# Altium PCB 04-12307_Drone_ESC.PcbDoc (part 5 of 5)
Units mm, origin at the board's own origin, x right, y up, seen from the top; angles counter-clockwise.
Board outline 55 x 33 mm, 4 copper layers (LAYER 1 (Top), LAYER 2, LAYER 3, LAYER 4 (Bottom)), stack 1.504 mm thick; 174 components, 90 nets, 407 pads, 193 vias.
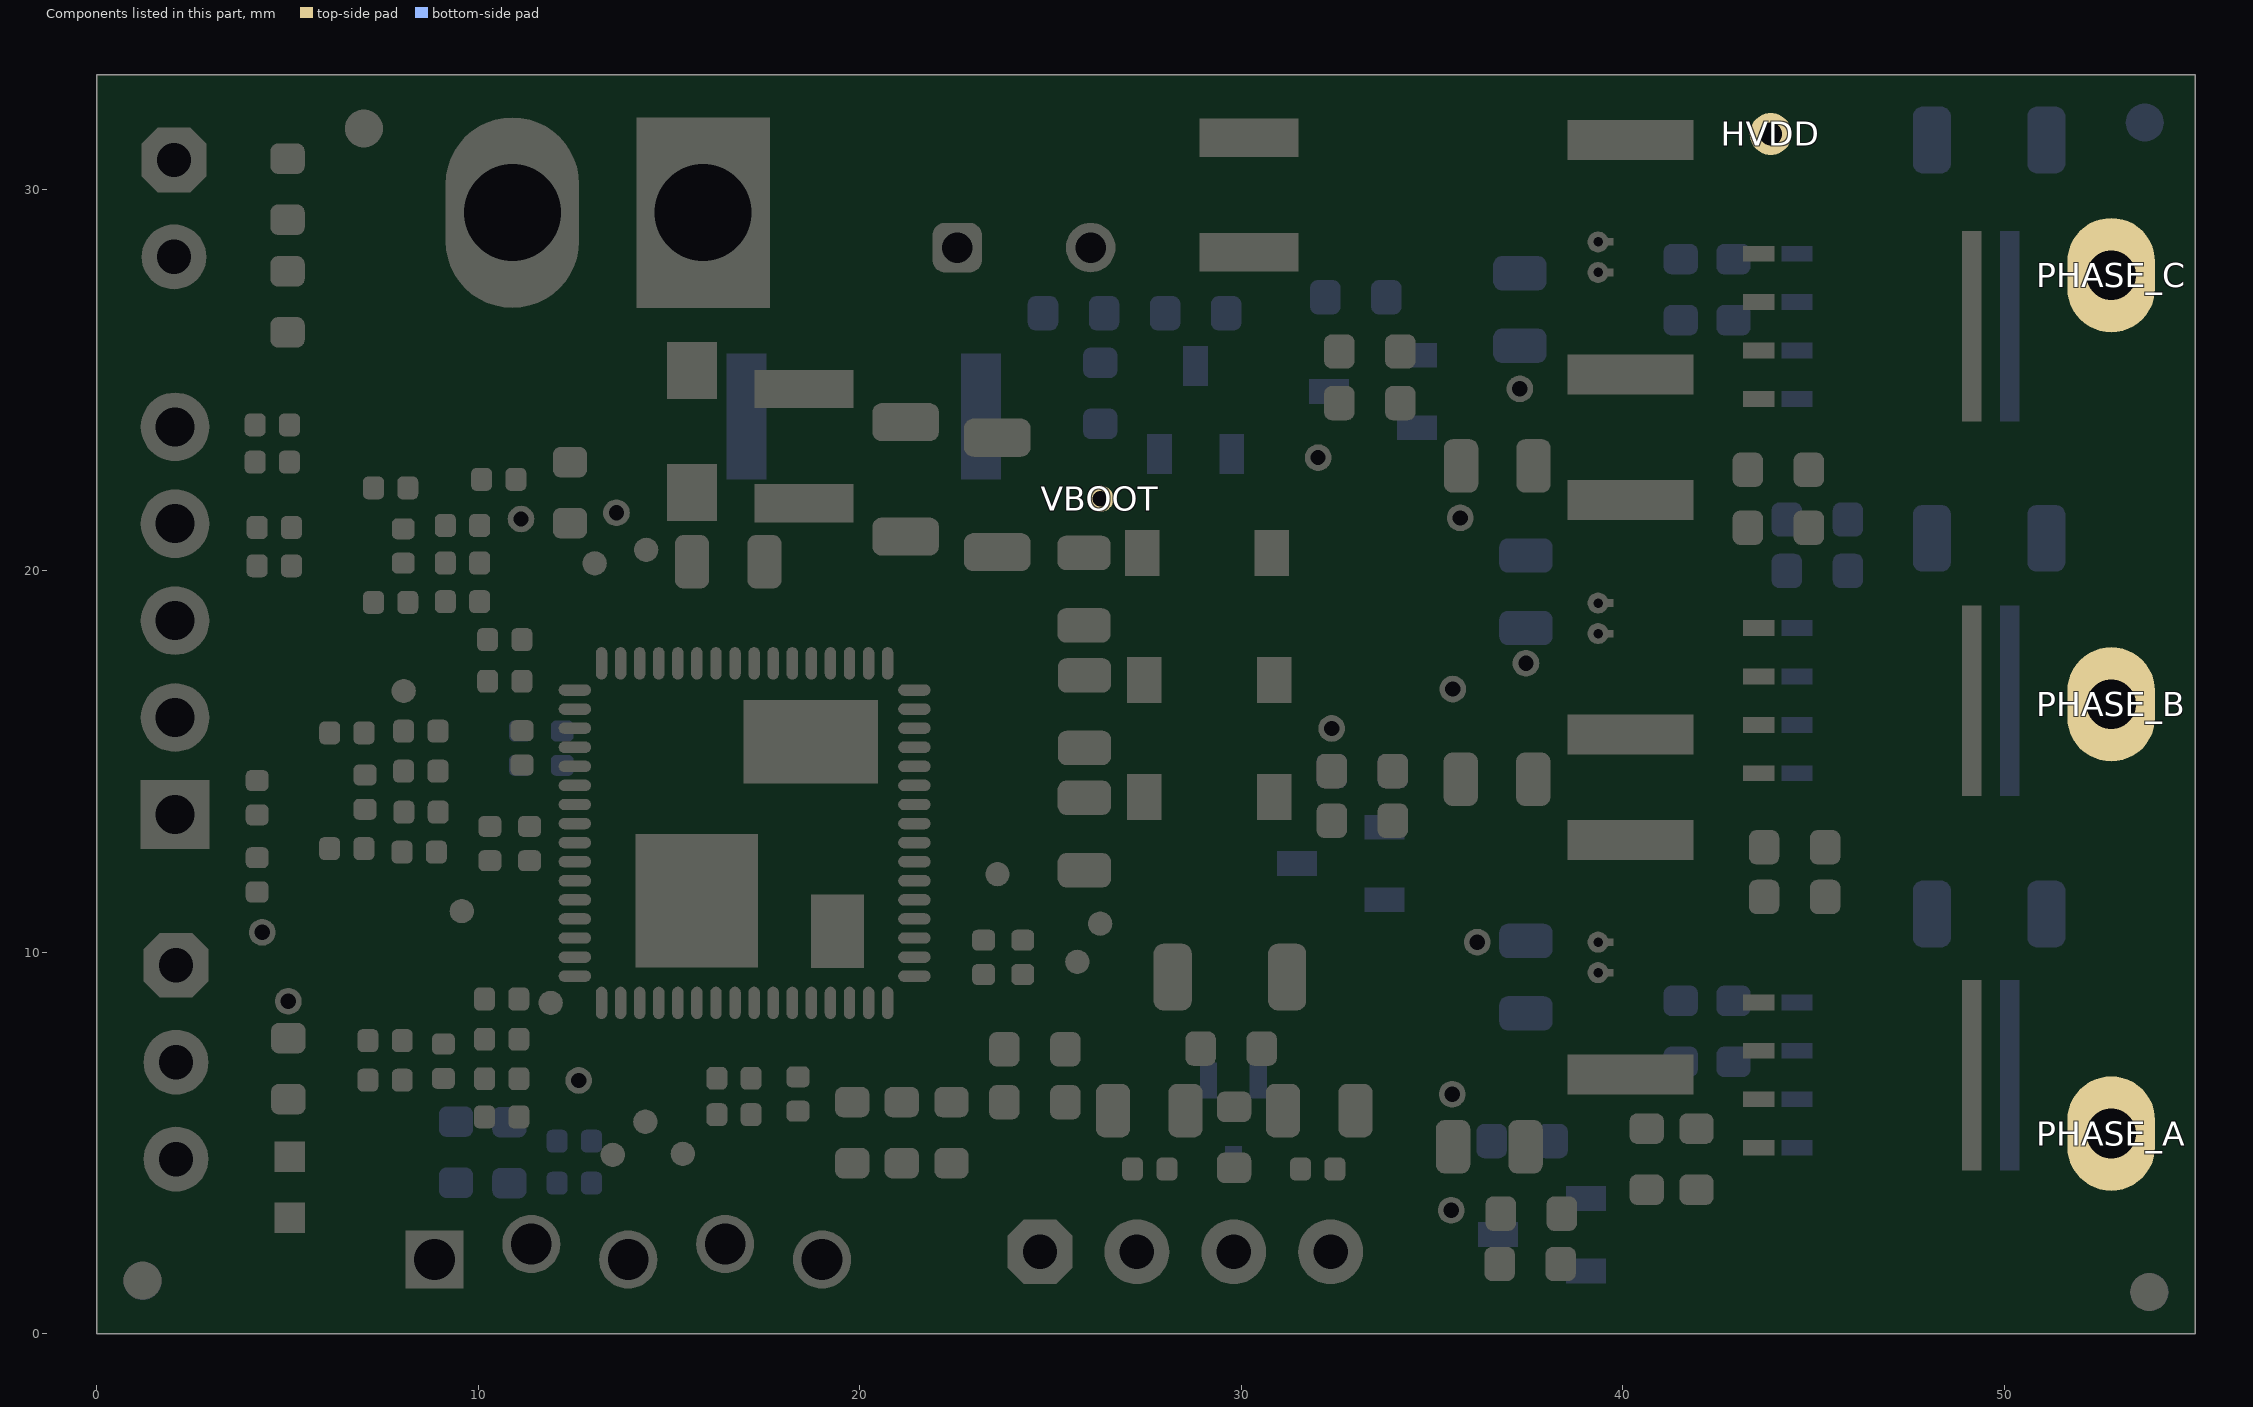
[diagram p5: the components of this part, seen from the top]

## Polygon pours and split planes (outlines as drawn)
GND on LAYER 1 (Top) "GND_L01_P066" (solid, remove dead copper, pour order 66): 9.501,32.1 11.674,32.1 12.775,31 12.775,26.629 11.571,25.425 9.598,25.425 8.118,26.905 8.118,30.717
PHASE_A on LAYER 1 (Top) "PHASE_A_L01_P044" (solid, remove dead copper, pour order 44): 53.289,2.23 53.88,2.23 54.2,2.55 54.2,11.05 45.113,11.05 45.113,0.95 52.009,0.95
NetC110_1 on LAYER 1 (Top) "NETC110_1_L01_P058" (solid, remove dead copper, pour order 58): 42.375,4.978 42.774,5.376 44.075,5.376 44.075,9.694 40.848,9.694 40.538,9.383 40.538,7.279 39.863,7.279 39.863,7.835 39.602,8.095 37.86,8.095 37.86,6.15 38.366,5.644 39.9,5.644 40,5.544 40,4.978
PHASE_B on LAYER 1 (Top) "PHASE_B_L01_P002" (solid, remove dead copper, pour order 2): 45.094,14.545 46.5,13.139 46.5,12.05 54.125,12.05 54.125,20.95 45.094,20.95
+5V on LAYER 1 (Top) "+5V_L01_P062" (solid, remove dead copper, pour order 62): 24.2,3.95 24.2,7.95 22.129,7.95 21.129,8.95 20.6,8.95 20.6,8.25 21.731,7.119 23.131,7.119 23.368,6.882 23.368,2.182 24.2,1.35 25.1,1.35 25.388,1.638 25.388,2.762
NetC109_1 on LAYER 1 (Top) "NETC109_1_L01_P045" (solid, remove dead copper, pour order 45): 41.8,21.32 42.389,20.73 43.7,20.73 43.7,23.15 42.9,23.95 42.9,24.852 43.217,25.169 44.1,25.169 44.1,28.553 40.96,28.553 40.538,28.131 40.538,25.65 39.852,25.65 39.852,26.275 38.468,26.275 38.468,21.32
HVDD on LAYER 1 (Top) "HVDD_L01_P059" (solid, remove dead copper, pour order 59): 18.2,19.55 18.2,20.958 17.9,21.258 17.229,21.258 17.229,23.063 17.435,23.27 19.745,23.27 19.908,23.106 19.908,20.858 18.6,19.55
GND on LAYER 1 (Top) "GND_L01_P052" (solid, remove dead copper, pour order 52): 33.8,24.535 33.8,23.996 35.251,23.996 38.182,26.926 38.231,30.215 38.787,30.771 42.565,30.771 42.565,32.288 14.9,32.289 14.9,24.535 14.9,23.913 15.038,23.775 19.795,23.775 20.747,22.822 31.172,22.822 31.55,23.2 31.55,26.26 31.84,26.55 33.8,26.55
NetC109_1 on LAYER 1 (Top) "NETC109_1_L01_P050" (solid, remove dead copper, pour order 50): 43.1,10.954 42.817,10.671 40.849,10.671 40.553,10.974 40.553,12.329 39.863,12.329 39.863,10.965 39.647,10.75 37.512,10.75 37.286,10.976 37.286,13.331 37.438,13.484 42.93,13.484 43.1,13.313
NetC108_1 on LAYER 1 (Top) "NETC108_1_L01_P034" (solid, remove dead copper, pour order 34): 38.4,17.75 38.4,15.103 44.152,15.103 44.3,14.955 44.3,13.85 44.907,13.243 44.907,11.05 45.7,11.05 45.7,13.314 44.7,14.293 44.7,19.15 44.445,19.405 41.071,19.405 40.501,18.836 40.501,16.211 39.816,16.211 39.816,17.75
VBOOT on LAYER 1 (Top) "VBOOT_L01_P049" (solid, remove dead copper, pour order 49): 22.704,22.054 23.1,22.45 30.986,22.45 31.3,22.136 31.3,13.45 29.4,13.45 29.4,20.997 29.067,21.33 24.78,21.33 24.5,21.05 24.5,19.968 22.704,19.968
VDD on LAYER 1 (Top) "VDD_L01_P047" (solid, remove dead copper, pour order 47): 4.667,29.604 4.667,27.509 6.118,27.509 6.401,27.792 6.401,29.369 6.166,29.604
VDC on LAYER 1 (Top) "VDC_L01_P037" (solid, remove dead copper, pour order 37): 32.4,31.9 32.15,32.15 13.956,32.15 13.956,26.85 22.3,26.85 23.788,28.338 25.8,30.35 31.9,30.35 32.4,30.85
PHASE_C on LAYER 1 (Top) "PHASE_C_L01_P039" (solid, remove dead copper, pour order 39): 53.478,32.372 54.104,31.746 54.104,23.119 45.1,23.119 45.1,32.372
NetC110_1 on LAYER 3 "NETC110_1_L03_P063" (solid, remove dead copper, pour order 63): 37.779,8.429 43.2,8.429 43.2,5.306 37.779,5.306
NetC109_1 on LAYER 3 "NETC109_1_L03_P055" (solid, remove dead copper, pour order 55): 37.627,13.881 44.6,13.881 44.6,10.758 37.627,10.758
NetC108_1 on LAYER 3 "NETC108_1_L03_P054" (solid, remove dead copper, pour order 54): 37.6,19.405 44.6,19.405 44.6,15.091 37.6,15.091
NetC109_1 on LAYER 3 "NETC109_1_L03_P024" (solid, remove dead copper, pour order 24): 37.9,26.25 43.075,26.25 43.075,22.526 37.9,22.526
PHASE_A on LAYER 3 "PHASE_A_L03_P025" (solid, remove dead copper, pour order 25): 51.273,8.75 51.273,1.872 54.048,1.872 54.048,8.75
PHASE_C on LAYER 3 "PHASE_C_L03_P026" (solid, remove dead copper, pour order 26): 51.396,23.97 51.396,30.05 54.1,30.05 54.1,23.97
PHASE_B on LAYER 3 "PHASE_B_L03_P043" (solid, remove dead copper, pour order 43): 51.4,12.951 51.4,20.049 54.1,20.049 54.1,12.951
VDD on LAYER 3 "VDD_L03_P053" (solid, remove dead copper, pour order 53): 34.6,0.65 34.6,24.75 8.3,24.75 8.3,29.65 0.6,29.65 0.6,0.65
VDC on LAYER 3 "VDC_L03_P046" (solid, remove dead copper, pour order 46): 32.7,26.25 35.55,29.1 40.2,29.1 41.549,27.751 45.749,27.751 46.3,27.2 46.3,5.54 51,5.54 51,32.35 13.956,32.35 13.956,26.25
PHASE_A on LAYER 4 (Bottom) "PHASE_A_L04_P028" (solid, remove dead copper, pour order 28): 52.715,1.599 53.332,2.217 54.02,2.217 54.193,2.397 54.193,8.55 51.5,8.55 51.5,1.599
GND on LAYER 4 (Bottom) "GND_L04_P065" (solid, remove dead copper, pour order 65): 4.6,32.3 3.7,31.4 3.7,30.3 2.6,29.204 1.675,29.204 0.7,28.229 0.7,3.6 3.65,0.65 34.322,0.65 34.322,32.3
PHASE_B on LAYER 4 (Bottom) "PHASE_B_L04_P064" (solid, remove dead copper, pour order 64): 44.166,17.4 44.166,14.436 45.678,14.436 45.678,17.4
VDC on LAYER 4 (Bottom) "VDC_L04_P032" (solid, remove dead copper, pour order 32): 22.2,25.975 21.425,26.75 13.956,26.75 13.956,32.3 49.444,32.3 50.6,31.144 50.6,2.75 46.252,2.75 46.252,28.798 45.7,29.35 25.677,29.35 25.2,28.873 25.2,26.35 24.663,25.813 24.663,22.613 24.4,22.35 22.493,22.35 22.2,22.643
PHASE_C on LAYER 4 (Bottom) "PHASE_C_L04_P031" (solid, remove dead copper, pour order 31): 41,26.961 41.116,27.078 43.423,27.078 43.795,27.45 45.663,27.45 45.663,24.208 44.1,24.208 44.1,25.61 43.56,26.15 41.1,26.15 41,26.25
HVDD on LAYER 4 (Bottom) "HVDD_L04_P060" (solid, remove dead copper, pour order 60): 19.5,22.35 19.805,22.65 19.805,23.722 17.767,25.76 16.469,25.76 16.469,22.35
NetC109_1 on LAYER 4 (Bottom) "NETC109_1_L04_P051" (solid, remove dead copper, pour order 51): 40.123,26.25 40.859,25.515 42.834,25.515 43.1,25.249 43.031,11.056 37.7,11.056 37.7,13.35 40,15.65 40,20.6 38.475,22.125 38.475,26.25
PHASE_C on LAYER 4 (Bottom) "PHASE_C_L04_P022" (solid, remove dead copper, pour order 22): 51.26,29.171 51.739,29.65 54.125,29.65 54.125,24.594 51.26,24.594
PHASE_A on LAYER 4 (Bottom) "PHASE_A_L04_P023" (solid, remove dead copper, pour order 23): 41.124,7.728 45.176,7.728 46.16,7.728 46.16,4.589 44.089,4.589 44.089,6.632 41.124,6.632 41.124,7.144
PHASE_B on LAYER 4 (Bottom) "PHASE_B_L04_P033" (solid, remove dead copper, pour order 33): 51.26,19.044 51.639,19.423 54.125,19.423 54.125,13.247 51.26,13.247
GND on LAYER 2 (split plane): 54.49,0.51 0.51,0.51 0.51,32.49 54.49,32.49
NetC109_1 on LAYER 2 (split plane): 47.749,10.964 36.937,10.964 33.551,14.349 33.551,22.546 39.054,28.049 47.749,28.049

## Keep-outs
Keep-Out Layer:
  text "'.Layer_Name'" at 229.531,-147.547 h1.5

## Other copper
LAYER 1 (Top):
  region net GND: 12.4,15.525 12.971,15.525 13.305,15.859 13.73,16.284 16.506,16.284 17.15,16.929 18.487,16.929 18.582,17.023 18.582,17.876 18.605,17.898 18.859,17.898 18.864,17.894 18.864,17.124 19.056,16.932 20.34,16.932 20.48,16.792 20.48,10.836 20.799,10.517 21.706,10.517 21.706,10.232 21.708,10.23 20.819,10.23 20.648,10.059 20.648,9.411 20.547,9.31 16.988,9.31 16.87,9.193 16.87,8.411 16.819,8.359 16.612,8.359 16.587,8.385 16.587,9.182 16.458,9.31 13.229,9.31 13.229,10.317 ccw(c13.229,10.91) 13.821,10.91 13.821,10.911 ccw(c13.3,10.911) 13.3,11.432 13.229,11.432 13.229,12.559 13.804,13.134 13.804,14.94 ccw(c13.286,14.83) 13.396,15.348 ccw(c13.286,14.836) 12.998,15.273 12.961,15.236 12.4,15.236
  region net VDD: 8.7,12.45 8.7,12.642 9.589,13.532 11.558,13.532 12.077,13.012 12.714,13.012 12.739,12.987 12.739,12.751 12.723,12.735 11.805,12.735 11.543,12.996 9.639,12.996 9.094,12.452 8.714,12.452
  text "'.ProjectRevisionART'" at 264.709,-147.369 h1.5
  text "'.Layer_Name'" at 229.531,-147.547 h1.5
LAYER 3:
  text "'.Layer_Name'" at 229.975,-147.625 h1.5
LAYER 4 (Bottom):
  pour cut-out: 28.241,9.453 26.753,9.453 24.438,7.138 24.438,5.759 29.816,5.759 30.7,4.875 30.7,1.199 30.148,0.647 34.769,0.647 34.769,28.821 30.125,28.821 30.104,28.8 31.084,27.82 31.084,22.4 28.207,19.523 23.366,19.523 21.208,17.365 21.208,8.616 19.6,7.007 19.6,3.475 21.325,3.475 21.325,7.3 25.798,11.773 32.237,11.77 33.079,12.613 33.079,13.705 34.3,13.705 34.3,12.42 33.929,12.049 33.113,12.049 30.531,9.467 28.255,9.467
  text ".ProjectRevisionART" at 264.709,-147.369 h1.5
  text ".ProjectRevisionART" at 264.709,-147.369 h1.5
  text "'.ProjectRevisionART'" at 264.709,-147.369 h1.5
  text "'.Layer_Name'" at 229.531,-147.547 h1.5
LAYER 2 (plane layer: these items are gaps in the copper):
  lines w0.25: 52.66,13.705 52.66,16.65 52.8,16.65 52.8,14.486 53.58,13.705 ; 52.66,25.052 52.66,27.864 52.8,27.864 52.8,25.832 53.58,25.052 ; 52.76,7.948 52.76,5.25 52.8,5.25
  lines w0.3: 33.4,14.287 33.4,22.609 38.991,28.2 47.9,28.2 47.9,10.813 36.874,10.813 33.4,14.287
  text "'.Layer_Name'" at 230.125,-147.625 h1.5

## Silkscreen, mask and mechanical layers (free items; w line width, h text height)
Top Overlay:
  text "+" at 19.044,29.985 h3
  text "M" at 5.599,23.168 h3.3
  text "GND" at 3.8,18.317 h1.5
  text "VDD" at 3.885,16.31 h1.5
  text "dsPIC®" at 23.937,13.821 h1.8 r90
  text "PWM" at 5.019,11.059 h1.5
  text "." at 8.413,4.606 h5 r270
  text "04-'.ProjectPCBNumber'" at 42.5,1.997 h1.8
  text "REV" at 42.625,0.517 h1.8
  text "'.ProjectRevisionART'" at 47.325,0.511 h1.8
  text "PGC" at 21.595,0.453 h1.5 r90
  text "MCLR" at 7.084,0.4 h1.5 r90
  text "'.ProjectRevisionART'" at 264.709,-147.369 h1.5
  text "'.Layer_Name'" at 229.531,-147.547 h1.5
Bottom Overlay:
  lines w0.2: 36.721,17.077 ccw(c39.851,14.428) 37.382,11.155 ; 38.681,18.358 cw(c39.851,14.428) 43.851,15.325
  text "*h" at 37.158,28.621 h4.1
  text "" at 7.9,28.6 h5
  text "C" at 29.739,9.417 h7
  text "" at 23.1,6.342 h10
  text "4" at 27.248,3.785 h5
  text "1" at 19.908,3.738 h5
  text "DRONE ESC" at 50.861,2.342 h1.6
  text "" at 7.3,0.8 h6
  text "dsPIC33CDV" at 51,0.788 h1.6
  text "'.ProjectRevisionART'" at 264.709,-147.369 h1.5
  text "'.Layer_Name'" at 229.531,-147.547 h1.5
Top Paste:
  text "'.ProjectRevisionART'" at 264.709,-147.369 h1.5
  text "'.Layer_Name'" at 229.531,-147.547 h1.5
Bottom Paste:
  text "'.ProjectRevisionART'" at 264.709,-147.369 h1.5
  text "'.Layer_Name'" at 229.531,-147.547 h1.5
Top Solder:
  text "'.ProjectRevisionART'" at 264.709,-147.369 h1.5
  text "'.Layer_Name'" at 229.531,-147.547 h1.5
Bottom Solder:
  text "'.ProjectRevisionART'" at 264.709,-147.369 h1.5
  text "'.Layer_Name'" at 229.531,-147.547 h1.5
Drill Guide:
  text "'.Layer_Name'" at 229.975,-147.55 h1.5
NOTES (M1):
  text "'.Layer_Name'" at 247.531,-147.547 h1.5
BOARD (M2):
  the board outline again, w0.1
  text "'.ProjectRevisionART'" at 264.709,-147.369 h1.5
  text "'.Layer_Name'" at 239.8,-147.6 h1.5
REF POINTS (M3):
  text "'.Layer_Name'" at 229.531,-147.547 h1.5
FAB (M4):
  lines w0.1: 0,0 0,33 55,33 55,0 0,0
  lines w0.15: 164.398,-110 174.753,-110 201.425,-110 221.207,-110 236.627,-110 ; 164.398,-106.4 174.753,-106.4 201.425,-106.4 221.207,-106.4 236.627,-106.4 ; 164.398,-102.8 174.753,-102.8 201.425,-102.8 221.207,-102.8 236.627,-102.8 ; 164.398,-99.2 174.753,-99.2 201.425,-99.2 221.207,-99.2 236.627,-99.2 ; 164.398,-95.6 174.753,-95.6 201.425,-95.6 221.207,-95.6 236.627,-95.6 ; 164.398,-92 174.753,-92 201.425,-92 221.207,-92 236.627,-92 ; 164.398,-88.4 174.753,-88.4 201.425,-88.4 221.207,-88.4 236.627,-88.4 ; 164.398,-84.8 174.753,-84.8 201.425,-84.8 221.207,-84.8 236.627,-84.8 ; 164.398,-81.2 174.753,-81.2 201.425,-81.2 221.207,-81.2 236.627,-81.2 ; 164.398,-77.6 174.753,-77.6 201.425,-77.6 221.207,-77.6 236.627,-77.6 ; 164.398,-74 236.627,-74 ; 174.753,-70.4 174.753,-113.6 ; 201.425,-70.4 201.425,-113.6 ; 221.207,-70.4 221.207,-113.6 ; 174.753,-113.6 201.425,-113.6 ; 174.753,-113.6 164.398,-113.6 164.398,-70.4 236.627,-70.4 236.627,-113.6 221.207,-113.6 ; 201.425,-113.6 221.207,-113.6
  lines w0.254: 186.975,42.704 189.515,45.244 ; 186.975,45.244 189.515,42.704 ; 257.714,28.281 259.238,28.281 ; 257.714,29.805 259.238,29.805 ; 258.476,29.043 258.476,30.567 ; 186.34,1.239 186.34,5.049 190.15,5.049 190.15,1.239 186.34,1.239 ; 186.34,6.849 186.34,10.659 190.15,10.659 190.15,6.849 186.34,6.849 ; 186.34,12.349 186.34,16.159 190.15,16.159 190.15,12.349 186.34,12.349 ; 186.34,17.629 186.34,21.439 190.15,21.439 190.15,17.629 186.34,17.629 ; 186.34,42.069 190.15,42.069 190.15,45.879 186.34,45.879 186.34,42.069 ; 186.84,-24.871 190.65,-24.871 190.65,-21.061 186.84,-21.061 186.84,-24.871 ; 196.58,-41.401 216.031,-41.401 216.031,-37.591 196.58,-37.591 196.58,-41.401 ; 206.531,-29.547 206.531,-25.737 266.531,-25.737 266.531,-29.547 206.531,-29.547 ; 206.66,-6.001 206.66,-2.191 270.16,-2.191 270.16,-6.001 206.66,-6.001 ; 214.28,42.069 218.09,42.069 218.09,45.879 214.28,45.879 214.28,42.069 ; 216.82,-18.701 216.82,-14.891 270.16,-14.891 270.16,-18.701 216.82,-18.701 ; 216.82,-12.351 216.82,-8.541 270.16,-8.541 270.16,-12.351 216.82,-12.351 ; 237.031,22.629 240.841,22.629 240.841,26.439 237.031,26.439 237.031,22.629 ; 237.14,27.519 246.03,27.519 246.03,31.329 237.14,31.329 237.14,27.519 ; 237.14,32.369 246.03,32.369 246.03,36.179 237.14,36.179 237.14,32.369 ; 237.14,37.219 246.03,37.219 246.03,41.029 237.14,41.029 237.14,37.219 ; 237.14,42.069 240.95,42.069 240.95,45.879 237.14,45.879 237.14,42.069 ; 245.87,-41.401 250.275,-41.401 250.275,-37.591 245.87,-37.591 245.87,-41.401 ; 254.031,22.629 257.841,22.629 257.841,26.439 254.031,26.439 254.031,22.629 ; 260,27.519 268.89,27.519 268.89,31.329 260,31.329 260,27.519
  text "THIS PCB TO BE MANUFACTURED TO MEET ALL ACCEPTANCE LEVELS" at 166.02,55.865 h1.78
  text "OF A CLASS 2 PCB PER ANSI/IPC-A-600G." at 166.02,52.055 h1.78
  text "MATERIAL:" at 166.02,47.435 h1.78
  text "FR-4 (Tg170) or Equivalent" at 186.34,47.435 h1.78
  text "CONTROLLED IMPEDANCE" at 242.531,43.203 h1.78
  text "MULTILAYER" at 192.055,43.085 h1.78
  text "4" at 215.55,43.085 h1.78
  text "LAYERS" at 219.995,43.085 h1.78
  text "Cu WEIGHT EXTERNAL LAYERS" at 186.34,38.235 h1.78
  text "70um" at 238.41,38.235 h1.78
  text "FINISHED" at 247.935,38.235 h1.78
  text "Cu WEIGHT INTERNAL LAYERS" at 186.34,33.385 h1.78
  text "35um" at 238.41,33.385 h1.78
  text "FINISHED" at 247.935,33.385 h1.78
  text "FINISHED OVERALL THICKNESS" at 186.34,28.535 h1.78
  text "1.6" at 239.68,28.535 h1.78
  text "mm" at 247.935,28.535 h1.78
  text "10" at 262.54,28.535 h1.78
  text "%" at 270.795,28.535 h1.78
  text "COPPER THIEVING ALLOWED" at 186.531,23.703 h1.78
  text "YES" at 243.531,23.703 h1.78
  text "NO" at 260.531,23.703 h1.78
  text "X" at 255.122,23.203 h2.6
  text "FINISH:" at 166.031,19.203 h1.78
  text "LEAD-FREE HOT AIR LEVELING" at 192.031,18.903 h1.78
  text "IMMERSION GOLD" at 192.055,13.365 h1.78
  text "X" at 187.349,12.865 h2.6
  text "IMMERSION TIN" at 192.055,7.865 h1.78
  text "SMOBC WITH SELECTIVE GOLD PLATING ON LANDS" at 192.055,4.16 h1.78
  text "INDICATED. 1um GOLD OVER 5-10 um NICKEL" at 192.055,0.35 h1.78
  text "SOLDERMASK" at 186.34,-4.985 h1.78
  text "DYNACHEM EPIC 200 LPI OR EQUIVALENT" at 207.93,-4.985 h1.78
  text "SOLDERMASK COLOR" at 186.34,-11.335 h1.78
  text "RED HIGH GLOSS" at 218.09,-11.335 h1.78
  text "SILKSCREEN COLOR" at 186.34,-17.685 h1.78
  text "WHITE" at 218.09,-17.685 h1.78
  text "Blind / Burried Vias" at 192.531,-23.797 h1.78
  text "DRILLING:" at 166.531,-24.047 h1.78
  text "Via Layer Pairs" at 187.031,-28.547 h1.78
  text "Top-Bottom" at 207.781,-28.547 h1.78
  text "ALL HOLES TO BE LOCATED BY THE COORDINATES FROM THE NC DRILL DATA PROVIDED." at 166.02,-33.797 h1.78
  text "04-'.ProjectPCBNumber'" at 198.031,-40.297 h1.78
  text "PCB REV" at 234.031,-40.297 h1.78
  text "'.ProjectRevisionART'" at 247.775,-40.35 h1.78
  text "USE ARTWORK SET NO." at 166.02,-40.385 h1.78
  text "ALL UL LOGO, MANUFACTURER'S ID, AND DATE CODES SHALL BE PLACED" at 166.02,-46.735 h1.78
  text "ON THE AVAILABLE SPACE ON THE BOTTOM SIDE SILKSCREEN LAYER UNLESS" at 166.02,-50.545 h1.78
  text "OTHERWISE INDICATED" at 165.825,-54.35 h1.78
  text "ANY ALTERNATIVES TO THE ABOVE SPECIFICATIONS MUST FIRST BE APPROVED." at 165.575,-61.975 h1.78
  text "REFERENCE STACK-UP (ONLY):" at 165.831,-67.022 h1.78
  text "Layer" at 166.452,-73.1 h1.8
  text "Name" at 176.807,-73.1 h1.8
  text "Material" at 206.933,-73.1 h1.8
  text "Thickness" at 223.355,-73.1 h1.8
  text "Top Overlay" at 176.807,-76.7 h1.8
  text "Top Solder" at 176.807,-80.3 h1.8
  text "Solder Resist" at 203.479,-80.3 h1.8
  text "0.010mm" at 223.544,-80.3 h1.8
  text "1" at 169.362,-83.9 h1.8
  text "LAYER 1 (Top)" at 176.807,-83.9 h1.8
  text "0.035mm" at 223.261,-83.9 h1.8
  text "Dielectric 1" at 176.807,-87.5 h1.8
  text "FR-4" at 208.175,-87.5 h1.8
  text "0.453mm" at 223.261,-87.5 h1.8
  text "2" at 168.976,-91.1 h1.8
  text "LAYER 2" at 176.807,-91.1 h1.8
  text "0.035mm" at 223.261,-91.1 h1.8
  text "Dielectric 2" at 176.807,-94.7 h1.8
  text "FR-4" at 208.175,-94.7 h1.8
  text "0.457mm" at 223.261,-94.7 h1.8
  text "3" at 168.976,-98.3 h1.8
  text "LAYER 3" at 176.807,-98.3 h1.8
  text "0.035mm" at 223.261,-98.3 h1.8
  text "Dielectric 3" at 176.807,-101.9 h1.8
  text "FR-4" at 208.175,-101.9 h1.8
  text "0.453mm" at 223.261,-101.9 h1.8
  text "4" at 168.933,-105.5 h1.8
  text "LAYER 4 (Bottom)" at 176.807,-105.5 h1.8
  text "0.035mm" at 223.261,-105.5 h1.8
  text "Bottom Solder" at 176.807,-109.1 h1.8
  text "Solder Resist" at 203.479,-109.1 h1.8
  text "0.010mm" at 223.544,-109.1 h1.8
  text "Bottom Overlay" at 176.807,-112.7 h1.8
  text "Total board thickness:" at 166.452,-116.3 h1.8
  text "1.524mm" at 223.544,-116.3 h1.8
  text "'.ProjectRevisionFAB'" at 264.709,-147.369 h1.5
  text "'.Layer_Name'" at 229.531,-147.547 h1.5
Case (M5):
  text "'.Layer_Name'" at 229.531,-147.547 h1.5
Cover (M6):
  text "'.Layer_Name'" at 229.531,-147.547 h1.5
Terminal Block (M7):
  text "'.Layer_Name'" at 229.531,-147.547 h1.5
Route Tool Path:
  text "'.Layer_Name'" at 229.531,-147.547 h1.5
V-Cut (M9):
  text "'.Layer_Name'" at 229.531,-147.547 h1.5
Bottom Assy TOP (M11)/Assy BOT (M10):
  text "'.VariantName'" at -20.899,-131.547 h0.9
  text "ASSEMBLY VARIANT:" at -6.649,-131.547 h0.9
  text "DOCUMENT NUMBER:" at -52.919,-139.797 h1.14
  text "02-'.ProjectPCBAssyNumber'-D" at -53.169,-142.797 h1.6
  text "'.ProjectRevisionASSY'" at -69.847,-147.369 h1.5
  text "'.Layer_Name'" at -34.969,-147.547 h1
Top Assy TOP (M11)/Assy BOT (M10):
  text "ASSEMBLY NOTES:  UNLESS OTHERWISE SPECIFIED:" at -25.448,-62.217 h5.08
  text "1. WORKMAN SHIP TO BE COMPLIANT WITH THE IPC-A-610, CLASS 2" at -25.448,-67.683 h3.17
  text "2. PRODUCT WILL BE ASSEMBLED USING RoHS COMPLIANT MANUFACTURING PROCESS." at -25.448,-71.992 h3.17
  text "3. ALL COMPONENTS MOUNTED FLUSH TO THE BOARD." at -25.448,-76.187 h3.17
  text "4. ALL LEADS SHALL BE TRIMMED TO A MAXIMUM HEIGHT OF 2mm." at -25.448,-80.632 h3.17
  text "5. ALL UNUSED THROUGH HOLE COMPONENT LOCATIONS SHALL BE FREE OF SOLDER." at -25.448,-85.077 h3.17
  text "6. FINISHED BOARD SHALL BE FREE OF ALL RESIDUES." at -25.448,-89.522 h3.17
  text "7. THIS ASSEMBLY CONTAINS ELECTROSTATIC DISCHARGE (ESD) DEVICES; /     STATIC-FREE HANDLING IS REQUIRED." at -25.448,-97.142 h3.17
  text "ASSEMBLY VARIANT:" at 201.531,-131.547 h0.9
  text "'.VariantName'" at 215.781,-131.547 h0.9
  text "DOCUMENT NUMBER:" at 247.781,-139.797 h1.15
  text "02-'.ProjectPCBAssyNumber'-D" at 248.031,-142.797 h1.6
  text "'.ProjectRevisionASSY'" at 264.709,-147.369 h1.5
  text "'.Layer_Name'" at 229.531,-147.547 h1
Bottom 3D TOP (M13)/3D BOT (M12):
  text "'.Layer_Name'" at 229.531,-147.547 h1.15
Top 3D TOP (M13)/3D BOT (M12):
  circle w0.1: c8.68,-1.15 r0.653
  text "'.Layer_Name'" at 229.531,-147.547 h1.2
Bottom Guard TOP (M15)/Guard BOT (M14):
  text ".ProjectRevisionART" at 264.709,-147.369 h1.5
  text "'.Layer_Name'" at 229.531,-147.547 h1
Top Guard TOP (M15)/Guard BOT (M14):
  text "'.ProjectRevisionART'" at 264.709,-147.369 h1.5
  text "'.Layer_Name'" at 229.531,-147.547 h1.1
TITLE (M16):
  lines w0.1: 201.031,-130.297 282.851,-130.297 ; 253.031,-122.797 253.031,-125.797 282.851,-125.797 ; 271.571,-147.432 271.571,-146.162 ; 271.571,-146.797 281.731,-146.797 ; 271.731,-145.597 271.731,-144.597 ; 271.731,-145.097 281.731,-145.097 ; 274.111,-147.432 274.111,-146.162 ; 276.651,-147.432 276.651,-146.162 ; 276.731,-145.397 276.731,-144.797 ; 279.191,-147.432 279.191,-146.162 ; 281.731,-147.432 281.731,-146.162 ; 281.731,-145.597 281.731,-144.597 ; 282.851,-125.797 282.851,-125.797
  lines w0.127: -93.069,-92.972 -87.989,-92.972 ; -93.069,-32.647 -87.989,-32.647 ; -93.069,27.678 -87.989,27.678 ; -29.569,-153.297 -29.569,-148.217 ; -29.569,82.923 -29.569,88.003 ; 33.931,-153.297 33.931,-148.217 ; 33.931,82.923 33.931,88.003 ; 97.431,-153.297 97.431,-148.217 ; 97.431,82.923 97.431,88.003 ; 132.991,-148.217 168.551,-148.217 ; 160.931,-153.297 160.931,-148.217 ; 160.931,82.923 160.931,88.003 ; 167.031,-148.217 167.031,-122.797 282.851,-122.797 ; 201.031,-148.217 201.031,-122.797 ; 201.031,-143.797 282.851,-143.797 ; 201.031,-137.797 282.851,-137.797 ; 201.031,-131.797 282.851,-131.797 ; 224.431,-153.297 224.431,-148.217 ; 224.431,82.923 224.431,88.003 ; 229.031,-148.217 229.031,-131.797 ; 247.031,-143.797 247.031,-137.797 ; 260.031,-148.217 260.031,-143.797 ; 267.531,-148.217 267.531,-137.797 ; 282.851,-117.737 282.851,-148.217 ; 282.851,-92.972 287.931,-92.972 ; 282.851,-32.647 287.931,-32.647 ; 282.851,27.678 287.931,27.678 ; 282.851,-148.217 -87.989,-148.217 -87.989,82.923 282.851,82.923 282.851,-148.217 ; -93.069,-153.297 287.931,-153.297 287.931,88.003 -93.069,88.003 -93.069,-153.297
  lines w0.254: 161.031,73.583 161.031,69.083 282.531,69.083 ; 161.031,82.703 161.031,78.203 ; 172.031,69.083 172.031,73.583 ; 172.031,73.703 172.031,78.203 172.031,82.703 ; 184.531,69.083 184.531,73.583 ; 184.531,73.703 184.531,78.203 184.531,82.703 ; 263.031,69.083 263.031,73.583 ; 263.031,73.703 263.031,78.203 263.031,82.703 ; 282.531,73.703 161.031,73.703 161.031,78.203 ; 282.531,78.203 161.031,78.203
  text "1" at -61.793,84.701 h1.78
  text "2" at 1.597,84.701 h1.78
  text "3" at 64.826,84.701 h1.78
  text "4" at 128.495,84.701 h1.78
  text "5" at 191.97,84.701 h1.78
  text "6" at 255.597,84.701 h1.78
  text "REV" at 163.531,79.703 h1.8
  text "ECO" at 173.531,79.703 h1.8
  text "Comments" at 220.031,79.203 h1.8
  text "Date" at 268.031,79.203 h1.8
  text "Initial Design" at 216.075,75.25 h1.78
  text "1" at 165.075,75.05 h1.78
  text "8/15/2024" at 265.875,75.05 h1.78
  text "-" at 173.731,75.003 h1.78
  text "Revised Layout" at 213.509,71.015 h1.78
  text "01/30/2026" at 264.746,70.538 h1.78
  text "-" at 173.731,70.383 h1.78
  text "2" at 165.244,70.303 h1.78
  text "A" at -91.164,55.669 h1.78
  text "A" at 284.756,55.669 h1.78
  text "B" at -91.164,-4.783 h1.78
  text "B" at 284.756,-4.783 h1.78
  text "C" at -91.164,-65.108 h1.78
  text "C" at 284.756,-65.108 h1.78
  text "PART NUMBER:" at 254.031,-124.797 h1
  text "'.ProjectpartNumber'" at 266.031,-125.047 h1.5
  text "D" at -91.164,-125.306 h1.78
  text "TITLE:" at 202.031,-125.297 h1.14
  text "D" at 284.756,-125.306 h1.78
  text "'.ProjectTitle'" at 202.031,-129.297 h2.5
  text "PCB DESIGNER:" at 202.031,-133.797 h1.15
  text "GERBER FILE:" at 230.031,-133.797 h1.15
  text "'.ProjectDrawnBy'" at 202.031,-136.797 h1.6
  text "'.Plot_File_Name'" at 230.031,-136.797 h1.5
  text "M" at 170.031,-138.797 h15.24
  text "ENGINEER:" at 202.031,-139.797 h1.15
  text "BOARD NUMBER:" at 230.031,-139.797 h1.15
  text "DATE:" at 268.731,-139.797 h1.14
  text "Microchip Technology Inc." at 168.801,-142.057 h1.78
  text "'.ProjectEngineer'" at 202.031,-142.797 h1.6
  text "04-'.ProjectPCBNumber'" at 230.031,-142.797 h1.6
  text "'.PRINT_DATE'" at 268.731,-142.797 h1.5
  text "2355 W. Chandler Blvd." at 170.031,-144.797 h1.78
  text "LAYER NAME:" at 230.031,-145.297 h1.14
  text "10mm" at 268.031,-145.397 h0.7
  text "PCB FILE NAME:" at 202.031,-145.547 h1.15
  text "REV:" at 260.781,-145.547 h1.14
  text "400mil" at 267.931,-147.097 h0.7
  text "Chandler, AZ  85224" at 171.031,-147.297 h1.78
  text "'.PCB_FILE_NAME_NO_PATH'" at 202.031,-147.547 h1
  text "1" at -61.793,-151.519 h1.78
  text "2" at 1.597,-151.519 h1.78
  text "3" at 64.826,-151.519 h1.78
  text "4" at 128.495,-151.519 h1.78
  text "5" at 191.97,-151.519 h1.78
  text "6" at 255.597,-151.519 h1.78
Drill Drawing:
  circle w0.254: c-37.148,-16.428 r0.847
  circle w0.254: c-37.148,-31.668 r0.508
  circle w0.254: c-37.148,-31.668 r0.847
  lines w0.254: -37.995,-46.061 -36.302,-46.061 -37.148,-47.755 -37.995,-46.061 ; -37.995,-43.945 -37.148,-43.521 -36.302,-43.945 -36.725,-43.098 -36.302,-42.251 -37.148,-42.675 -37.995,-42.251 -37.572,-43.098 -37.995,-43.945 ; -37.995,-39.711 -37.572,-39.711 -37.572,-40.135 -36.725,-40.135 -36.725,-39.711 -36.302,-39.711 -36.302,-38.865 -36.725,-38.865 -36.725,-38.441 -37.572,-38.441 -37.572,-38.865 -37.995,-38.865 -37.995,-39.711 ; -37.995,-34.631 -36.302,-34.631 -37.148,-36.325 -37.995,-34.631 ; -37.995,-28.281 -37.572,-28.281 -37.148,-28.705 -36.725,-28.281 -36.302,-28.281 -36.725,-27.858 -36.302,-27.435 -36.725,-27.435 -37.148,-27.011 -37.572,-27.435 -37.995,-27.435 -37.572,-27.858 -37.995,-28.281 ; -37.995,-24.048 -37.148,-24.895 -36.302,-24.048 -37.148,-23.201 -37.995,-24.048 ; -37.995,-21.085 -37.148,-20.661 -36.302,-21.085 -36.725,-20.238 -36.302,-19.391 -37.148,-19.815 -37.995,-19.391 -37.572,-20.238 -37.995,-21.085 ; -37.995,-13.465 -36.302,-13.465 -36.302,-11.771 -37.995,-11.771 -37.995,-13.465 ; -37.656,-46.4 -36.64,-46.4 -37.148,-47.416 -37.656,-46.4 ; -37.656,-20.746 -37.148,-20.492 -36.64,-20.746 -36.894,-20.238 -36.64,-19.73 -37.148,-19.984 -37.656,-19.73 -37.402,-20.238 -37.656,-20.746
  lines w0.381: -39.514,-48.898 93.698,-48.898 ; -39.514,-10.798 93.698,-10.798 ; -25.521,-52.708 -25.521,-6.988 ; -7.797,-52.708 -7.797,-6.988 ; 26.381,-52.708 26.381,-6.988 ; 39.231,-52.708 39.231,-6.988 ; 54.213,-52.708 54.213,-6.988 ; -39.514,-52.708 93.698,-52.708 93.698,-6.988 -39.514,-6.988 -39.514,-52.708
  text "Symbol" at -37.228,-9.655 h1.83
  text "Hit Count" at -24.378,-9.655 h1.83
  text "Finished Hole Size" at -6.654,-9.655 h1.83
  text "Plated" at 27.524,-9.655 h1.83
  text "Via/Pad" at 40.374,-9.655 h1.83
  text "Hole Tolerance" at 55.356,-9.655 h1.83
  text "174" at -24.378,-13.465 h1.52
  text "0.250mm (9.84mil)" at -6.654,-13.465 h1.52
  text "PTH" at 27.524,-13.465 h1.52
  text "(Mixed)" at 40.374,-13.465 h1.52
  text "+0/-0.100mm (+0/-3.94mil)" at 55.356,-13.465 h1.52
  text "25" at -24.378,-17.275 h1.52
  text "0.300mm (11.81mil)" at -6.654,-17.275 h1.52
  text "PTH" at 27.524,-17.275 h1.52
  text "Via" at 40.374,-17.275 h1.52
  text "+0/-0.100mm (+0/-3.94mil)" at 55.356,-17.275 h1.52
  text "15" at -24.378,-21.085 h1.52
  text "0.400mm (15.75mil)" at -6.654,-21.085 h1.52
  text "PTH" at 27.524,-21.085 h1.52
  text "Pad" at 40.374,-21.085 h1.52
  text "+/-0.076mm(+/-3mil)" at 55.356,-21.085 h1.52
  text "1" at -24.378,-24.895 h1.52
  text "0.600mm (23.62mil)" at -6.654,-24.895 h1.52
  text "PTH" at 27.524,-24.895 h1.52
  text "Pad" at 40.374,-24.895 h1.52
  text "+/-0.076mm(+/-3mil)" at 55.356,-24.895 h1.52
  text "2" at -24.378,-28.705 h1.52
  text "0.800mm (31.50mil)" at -6.654,-28.705 h1.52
  text "PTH" at 27.524,-28.705 h1.52
  text "Pad" at 40.374,-28.705 h1.52
  text "+/-0.076mm(+/-3mil)" at 55.356,-28.705 h1.52
  text "9" at -24.378,-32.515 h1.52
  text "0.900mm (35.43mil)" at -6.654,-32.515 h1.52
  text "PTH" at 27.524,-32.515 h1.52
  text "Pad" at 40.374,-32.515 h1.52
  text "+/-0.076mm(+/-3mil)" at 55.356,-32.515 h1.52
  text "5" at -24.378,-36.325 h1.52
  text "1.020mm (40.16mil)" at -6.654,-36.325 h1.52
  text "PTH" at 27.524,-36.325 h1.52
  text "Pad" at 40.374,-36.325 h1.52
  text "+/-0.076mm(+/-3mil)" at 55.356,-36.325 h1.52
  text "5" at -24.378,-40.135 h1.52
  text "1.067mm (42.00mil)" at -6.654,-40.135 h1.52
  text "PTH" at 27.524,-40.135 h1.52
  text "Pad" at 40.374,-40.135 h1.52
  text "+/-0.076mm(+/-3mil)" at 55.356,-40.135 h1.52
  text "3" at -24.378,-43.945 h1.52
  text "1.300mm (51.18mil)" at -6.654,-43.945 h1.52
  text "PTH" at 27.524,-43.945 h1.52
  text "Pad" at 40.374,-43.945 h1.52
  text "+/-0.076mm(+/-3mil)" at 55.356,-43.945 h1.52
  text "2" at -24.378,-47.755 h1.52
  text "2.540mm (100.00mil)" at -6.654,-47.755 h1.52
  text "PTH" at 27.524,-47.755 h1.52
  text "Pad" at 40.374,-47.755 h1.52
  text "+/-0.076mm(+/-3mil)" at 55.356,-47.755 h1.52
  text "241 Total" at -24.378,-51.565 h1.52
  text "DOCUMENT NUMBER:" at 247.781,-139.797 h1.15
  text "04-'.ProjectPCBNumber'-D" at 248.031,-142.797 h1.6
  text "'.ProjectRevisionFAB'" at 264.709,-147.369 h1.5
  text "'.Layer_Name'" at 240,-147.6 h1.5
TITLE MIRROR (M17):
  lines w0.1: -87.969,-130.297 -6.149,-130.297 ; -86.869,-147.432 -86.869,-146.162 ; -86.869,-146.797 -76.709,-146.797 ; -86.869,-145.597 -86.869,-144.597 ; -86.869,-145.097 -76.869,-145.097 ; -84.329,-147.432 -84.329,-146.162 ; -81.869,-145.397 -81.869,-144.797 ; -81.789,-147.432 -81.789,-146.162 ; -79.249,-147.432 -79.249,-146.162 ; -76.869,-145.597 -76.869,-144.597 ; -76.709,-147.432 -76.709,-146.162 ; -58.149,-122.797 -58.149,-125.797 -87.969,-125.797 ; -87.969,-125.797 -87.969,-125.797
  lines w0.127: -93.069,-92.972 -87.989,-92.972 ; -93.069,-32.647 -87.989,-32.647 ; -93.069,27.678 -87.989,27.678 ; -87.989,-143.797 -6.169,-143.797 ; -87.989,-137.797 -6.169,-137.797 ; -87.969,-131.797 -6.149,-131.797 ; -87.969,-122.797 27.851,-122.797 27.851,-148.217 ; -72.669,-148.217 -72.669,-137.797 ; -65.169,-148.217 -65.169,-143.797 ; -52.169,-143.797 -52.169,-137.797 ; -34.149,-148.217 -34.149,-131.797 ; -29.569,-153.297 -29.569,-148.217 ; -29.569,82.923 -29.569,88.003 ; -6.149,-148.217 -6.149,-122.797 ; 33.931,-153.297 33.931,-148.217 ; 33.931,82.923 33.931,88.003 ; 97.431,-153.297 97.431,-148.217 ; 97.431,82.923 97.431,88.003 ; 160.931,-153.297 160.931,-148.217 ; 160.931,82.923 160.931,88.003 ; 224.431,-153.297 224.431,-148.217 ; 224.431,82.923 224.431,88.003 ; 282.851,-92.972 287.931,-92.972 ; 282.851,-32.647 287.931,-32.647 ; 282.851,27.678 287.931,27.678 ; -93.069,-153.297 -93.069,88.003 287.931,88.003 287.931,-153.297 -93.069,-153.297 ; -87.989,-148.217 -87.989,82.923 282.851,82.923 282.851,-148.217 -87.989,-148.217
  text "6" at -60.735,84.701 h1.78
  text "5" at 2.892,84.701 h1.78
  text "4" at 66.366,84.701 h1.78
  text "3" at 130.036,84.701 h1.78
  text "2" at 193.265,84.701 h1.78
  text "1" at 256.655,84.701 h1.78
  text "A" at -89.894,55.669 h1.78
  text "A" at 286.026,55.669 h1.78
  text "B" at -89.894,-4.783 h1.78
  text "B" at 286.026,-4.783 h1.78
  text "C" at -89.894,-65.108 h1.78
  text "C" at 286.026,-65.108 h1.78
  text "PART NUMBER:" at -59.149,-124.797 h1
  text "TITLE:" at -7.149,-124.797 h1.14
  text "'.ProjectpartNumber'" at -71.149,-125.047 h1.5
  text "D" at -89.894,-125.306 h1.78
  text "D" at 286.026,-125.306 h1.78
  text "'.ProjectTitle'" at -7.149,-129.297 h2.5
  text "GERBER FILE:" at -35.149,-133.797 h1.14
  text "PCB DESIGNER:" at -7.149,-133.797 h1.14
  text "'.Plot_File_Name'" at -35.149,-136.797 h1.5
  text "'.ProjectDrawnBy'" at -7.149,-136.797 h1.78
  text "M" at 24.851,-138.797 h15.24
  text "DATE:" at -73.869,-139.797 h1.14
  text "BOARD NUMBER:" at -35.169,-139.797 h1.14
  text "ENGINEER:" at -7.169,-139.797 h1.14
  text "Microchip Technology Inc." at 26.081,-142.057 h1.78
  text "'.PRINT_DATE'" at -73.869,-142.797 h1.5
  text "04-'.ProjectPCBNumber'" at -35.169,-142.797 h1.6
  text "'.ProjectEngineer'" at -7.169,-142.797 h1.78
  text "2355 W. Chandler Blvd." at 24.851,-144.797 h1.78
  text "LAYER NAME:" at -35.169,-145.297 h1.14
  text "10mm" at -73.169,-145.397 h0.7
  text "REV:" at -65.919,-145.547 h1.14
  text "PCB FILE NAME:" at -7.169,-145.547 h1.14
  text "400mil" at -73.069,-147.097 h0.7
  text "Chandler, AZ  85224" at 23.851,-147.297 h1.78
  text "'.PCB_FILE_NAME_NO_PATH'" at -7.169,-147.547 h1.14
  text "6" at -60.735,-151.519 h1.78
  text "5" at 2.892,-151.519 h1.78
  text "4" at 66.366,-151.519 h1.78
  text "3" at 130.036,-151.519 h1.78
  text "2" at 193.265,-151.519 h1.78
  text "1" at 256.655,-151.519 h1.78

## Dimensions
55,33 to 55,0 on FAB (M4)
0,33 to 55,33 on FAB (M4)

## Text inside footprints (layer, text, board x,y; h text height)
C3: Top Overlay "+" at 21.4,32.8 h2 r180; Top Assy TOP (M11)/Assy BOT (M10) "+" at 21.6,29 h1.5 r180
C48: Top Guard TOP (M15)/Guard BOT (M14) "C" at 23.901,21.79 h0.6 r90
C49: Top Guard TOP (M15)/Guard BOT (M14) "C" at 21.5,22.197 h0.6 r90
C100: Bottom Guard TOP (M15)/Guard BOT (M14) "C" at 49.4,31.592 h0.6 r180
C102: Bottom Guard TOP (M15)/Guard BOT (M14) "C" at 49.4,21.152 h0.6 r180
C103: Bottom Guard TOP (M15)/Guard BOT (M14) "C" at 49.4,11.304 h0.6 r180
J1: Top Overlay "1" at 19.1,26.8 h1.1; Top Assy TOP (M11)/Assy BOT (M10) "1" at 17.2,27.7 h1
J6: Top Overlay "PIN 1" at 5.98,4.979 h1.5
Q1: Bottom Assy TOP (M11)/Assy BOT (M10) "1" at 45.725,4.679 h0.9
Q2: Top Assy TOP (M11)/Assy BOT (M10) "1" at 44.425,8.329 h1
Q3: Bottom Assy TOP (M11)/Assy BOT (M10) "1" at 45.775,14.478 h0.9
Q4: Top Assy TOP (M11)/Assy BOT (M10) "1" at 44.425,18.128 h1
Q5: Bottom Assy TOP (M11)/Assy BOT (M10) "1" at 45.775,24.275 h1
Q6: Top Assy TOP (M11)/Assy BOT (M10) "1" at 44.525,27.9 h1